# Altium PCB my_ws2812.PcbDoc
Units mil, origin at the board's own origin, x right, y up, seen from the top; angles counter-clockwise.
Board outline 2015 x 1968.5 mil, 2 copper layers (Top Layer, Bottom Layer); 35 components, 33 nets, 131 pads, 41 vias.
Unrouted connection lines stored in the file: 28.
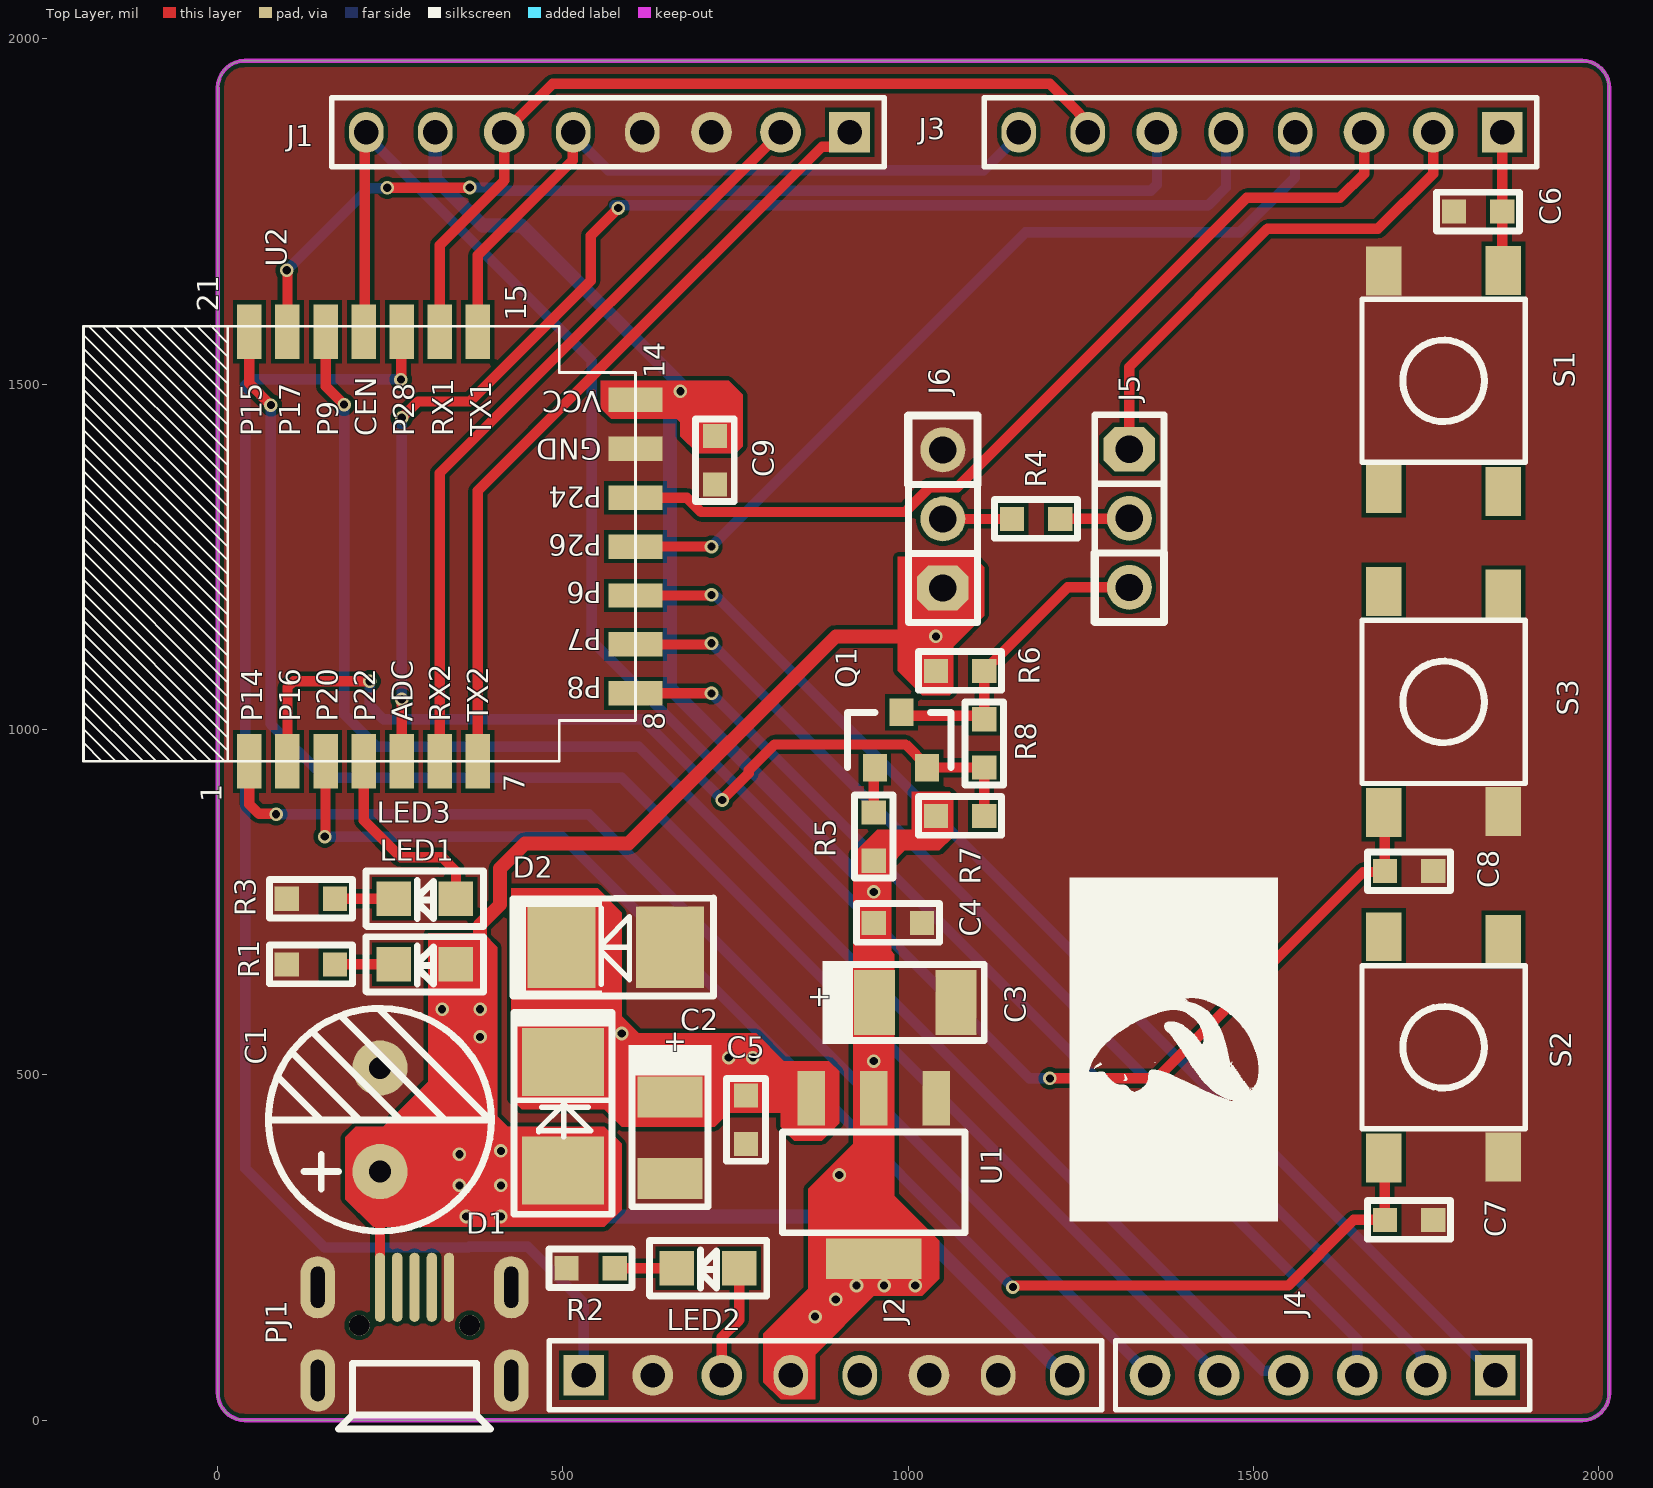
[diagram p0: Top Layer view]
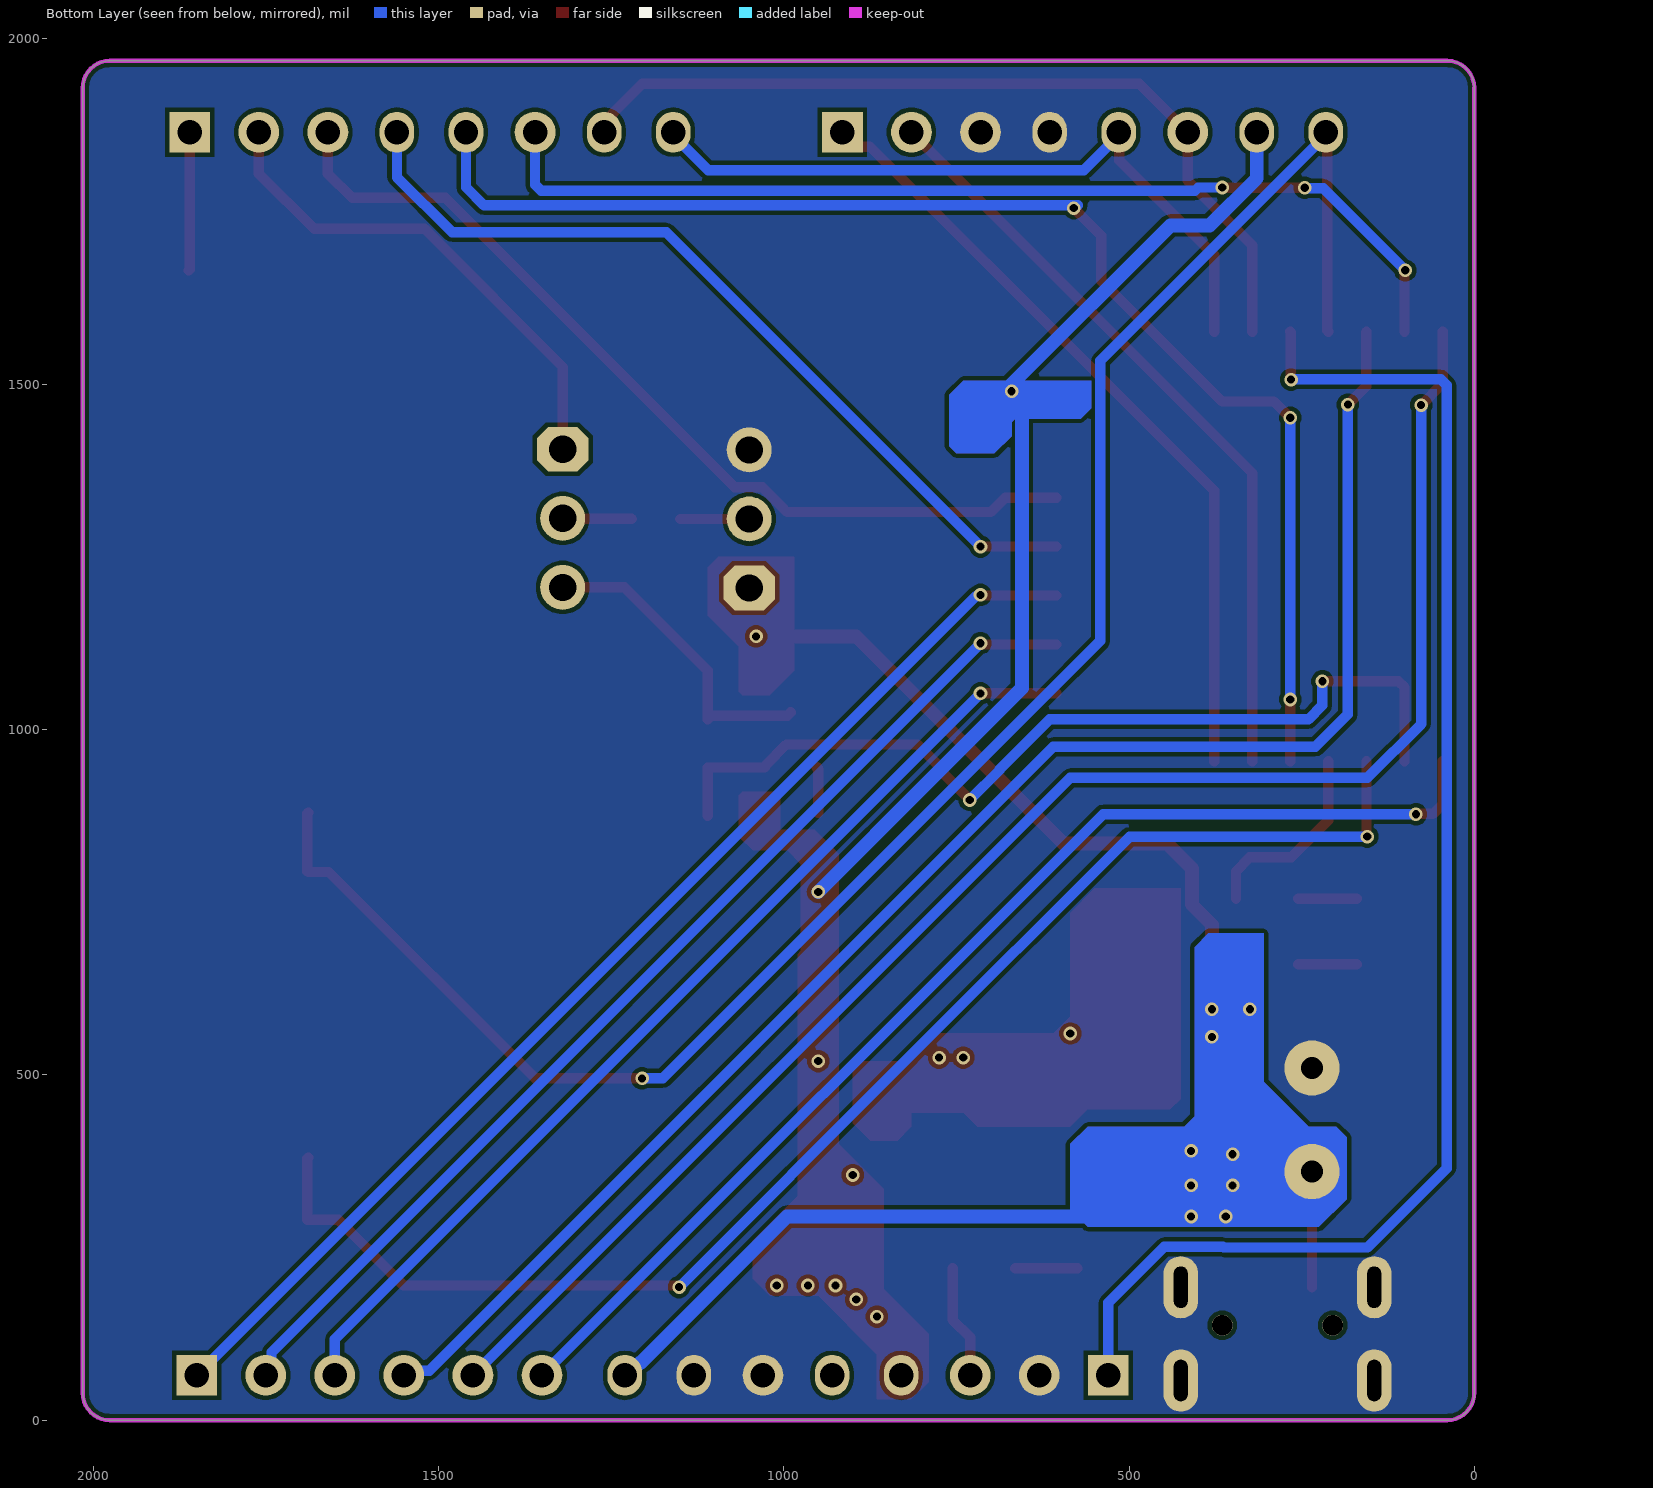
[diagram p1: Bottom Layer view, seen from below]

## Layer stack, top to bottom
Top Solder: solder mask 0.4, Solder Resist, Dk 3.5
Top Layer: signal copper 1.4
Dielectric 1: dielectric 12.6, FR-4, Dk 4.8
Bottom Layer: signal copper 1.4
Bottom Solder: solder mask 0.4, Solder Resist, Dk 3.5

## Board outline
0.01,40.39 0,1929.15 cw(c39.37,1929.13) 39.37,1968.5 1975.61,1968.5 cw(c1975.63,1929.13) 2015,1929.13 2015,39.37 cw(c1975.63,39.37) 1975.63,0 39.37,0 cw(c39.37,39.37)

## Design rules (kind name [scope] priority, off if disabled: settings)
Clearance [All] p1: gap=6 ignorepadtopadclearanceinfootprint=FALSE
HoleToHoleClearance [All] p1: gap=6 allowstackedmicrovias=TRUE
MinimumSolderMaskSliver [All] p1: minsoldermaskwidth=0
PlaneClearance [All] p1: clearance=6
PlaneConnect [All] p1: planeconnectstyle=Direct reliefexpansion=20 reliefentries=4 reliefconductorwidth=10 reliefairgap=10
PolygonConnect [All] p1: connectstyle=Direct reliefconductorwidth=10 reliefentries=4 polygonreliefangle="90 Angle" airgapwidth=10
RoutingVias [All] p1: holewidth=28 width=50 viastyle="Through Hole" minholewidth=28 minwidth=50 maxholewidth=28 maxwidth=50
SilkToSilkClearance [All] p1: silktosilkclearance=0
SilkToSolderMaskClearance [IsPad] p1: minsilkscreentomaskgap=0 clearancetoexposedcopper=TRUE
SolderMaskExpansion [All] p1: expansion=4 istentingtop=FALSE
Width [All] p1: maxlimit=20 minlimit=4 preferedwidth=6
24 further rules are at their usual default settings.

## Components (designator, comment, footprint, x,y, rotation, side; value= is the part's Value field where it differs from the comment)
C1 "220uF±20%/16V" CD0.15 235,435 r90 top
C2 "22uF±20%/16V" 钽电容B3528 655,409.06 r270 top
C3 "22uF±20%/16V" 钽电容B3528 1010,605 r0 top
C4 "0.1uF±20%/50V" C0603 950,720 r0 top
C5 "0.1uF±20%/50V" C0603 765,470 r270 top
C6 "0.1uF±20%/16V" C0603 1790,1750 r0 top
C7 "0.1uF±20%/16V" C0603 1760,290 r180 top
C8 "0.1uF±20%/16V" C0603 1690,795 r0 top
C9 "0.1uF±20%/16V" C0603 720,1355 r90 top
D1 "SS210" SMA(DO-214AC) 500,440 r90 top
D2 "SMBJ05CA" SMB(DO-214AA) 576.26,685 r180 top
J1 "CON8" HDR1X8Z 915,1865 r180 top
J2 "CON8" HDR1X8Z 530,65 r0 top
J3 "CON8" HDR1X8Z 1860,1865 r180 top
J4 "CON6" HDR1X6Z 1850,65 r180 top
J5 "KF301-3P" "SIP3 - 2.54" 1320,1405.91 r270 top
J6 "KF301-3P" "SIP3 - 2.54" 1050,1205 r90 top
LED1 "LED" LED0805_1 345,660 r180 top
LED2 "LED" LED0805_1 755,220 r180 top
LED3 "LED" LED0805_1 345,755 r180 top
PJ1 "MCR_USB" MICRO_USB-NEW-16.12.12 285,125 r180 top
Q1 "S8050" SOT-23-NPN 952,945 r0 top
R1 "1R±5%" R0603 170,660 r180 top
R2 "1K±5%" R0603 505,220 r0 top
R3 "1K±5%" R0603 170,755 r180 top
R4 "1R±5%" R0603 1220,1305 r180 top
R5 "2K±5%" R0603 950,810 r90 top
R6 "2K±5%" R0603 1040,1085 r0 top
R7 "2K±5%" R0603 1040,875 r0 top
R8 "NC/0R" R0603 1110,945 r90 top
S1 "KEY_SW2" KEY4-SMD 1775,1505 r270 top
S2 "KEY_SW2" KEY4-SMD 1775,540 r90 top
S3 "KEY_SW2" KEY4-SMD 1775,1040 r90 top
U1 "GM1117-3.3ST3T" SOT-223 950,350 r180 top
U2 "WIFI_BLE_CBU" WIFI_BLE_CBU 605,1265 r90 top

## Footprints (in the part's own frame and the unit in brackets; to place one, negate y for a bottom-side part, rotate by r counter-clockwise, add the part's x,y. Pads: shape width x height; smd on the part's side, far side on the other; paste and mask are expansions set on the pad)
C0603 [mil]
  rect 35x35 smd: 1(0,0) 2(70,0)
  silkscreen extent -25,-28 95,28, body extent 4,-16 66,15, height 12
CD0.15 [mil]
  round 80 hole 32: 1(-75,0) 2(75,0)
  silkscreen extent -161,-161 161,161, body extent -156,-150 158,165, height 630
HDR1X6Z [mm]
  rect 1.5x1.5 hole 0.9: 1(0,0)
  round 1.5 hole 0.9: 2(2.54,0) 3(5.08,0) 4(7.62,0) 5(10.16,0) 6(12.7,0)
  silkscreen extent -1.27,-1.27 13.97,1.27, body extent -1.27,-1.25 13.97,1.25, height 8.65
HDR1X8Z [mm]
  rect 1.5x1.5 hole 0.9: 1(0,0)
  round 1.5 hole 0.9: 2(2.54,0) 3(5.08,0) 6(12.7,0)
  oval 1.27x1.5 hole 0.9: 4(7.62,0) 5(10.16,0) 7(15.24,0) 8(17.78,0)
  silkscreen extent -1.27,-1.27 19.05,1.27, body extent -1.27,-1.25 19.05,1.25, height 8.65
KEY4-SMD [mm]
  rect 1.8x1.3 smd: 1(-4.035,-2.2) 2(-4.065,2.2) 3(4.065,2.2) 4(3.965,-2.2)
  silkscreen extent -3,-3 3,3
LED0805_1 [mil]
  rect 50x50 smd: 1(0,0) 2(90,0)
  silkscreen extent -40,-40 130,40, body extent 6,-25 84,24, height 30
MICRO_USB-NEW-16.12.12 [mil]
  oval 15x100 smd: 1(-50,-67.5) 2(-25,-67.5) 3(0,-67.5) 4(25,-67.5) 5(50,-67.5)
  oval 50x90 hole 20 slot 60 at 90 deg: 6(-140,-67.5) 7(-140,67.5) 8(140,67.5) 9(140,-67.5)
  round 30 hole 30 unplated: ""(-80,-12.5) ""(80,-12.5)
  silkscreen extent -110,42 110,138, body extent -145,-79 146,158, height 93
R0603 [mil]
  rect 35x35 smd: 1(0,0) 2(70,0)
  silkscreen extent -25,-28 95,28, body extent 2,-16 65,16, height 18
"SIP3 - 2.54" [mil]
  oct 65x75 hole 39.37: 1(0,0)
  round 65 hole 39.37: 2(100,0) 3(200,0)
  silkscreen extent -50,-50 250,50
SMA(DO-214AC) [mm]
  rect 2.5x3 smd: 1(-2,0) 2(2,0)
  silkscreen extent -3.6,-1.84 3.94,1.83, body extent -2.21,-1.38 2.46,1.27, height 2.35
SMB(DO-214AA) [mm]
  rect 2.5x3 smd: 1(-2,0) 2(2,0)
  silkscreen extent -3.6,-1.8 3.91,1.82, body extent -2.28,-1.33 2.39,1.32, height 2.35
SOT-23-NPN [mil]
  rect 35x40 smd: 1(75,0) 2(0,0) 3(38,80)
  silkscreen extent -40,0 110,80, body extent -17,-17 97,80, height 39
SOT-223 [mm]
  rect 1x2 smd: 1(-2.3,-2.95) 2(0,-2.95) 3(2.3,-2.95)
  rect 3.5x1.5 smd: 2(0,2.95)
  silkscreen extent -3.35,-1.71 3.35,1.99, body extent -3.29,-3.55 3.21,3.41, height 1.65
WIFI_BLE_CBU [mm]
  rect 2x0.9 smd: 1(-7.9,14.2) 2(-7.9,12.8) 3(-7.9,11.4) 4(-7.9,10) 5(-7.9,8.6) 6(-7.9,7.2) 7(-7.9,5.8) 15(7.9,5.8) 16(7.9,7.2) 17(7.9,8.6) 18(7.9,10) 19(7.9,11.4) 20(7.9,12.8) 21(7.9,14.2)
  rect 0.9x2 smd: 8(-5.4,0) 9(-3.6,0) 10(-1.8,0) 11(0,0) 12(1.8,0) 13(3.6,0) 14(5.4,0)
  silkscreen extent -7.9,0 8.14,20.33
钽电容B3528 [mm]
  rect 1.5x2.4 smd: 1(-1.5,0) 2(1.5,0)
  silkscreen extent -3.4,-1.53 2.54,1.52

## Part data
C1 C2 C3: library part "CAPACITOR POL", "Capacitor"
C4 C5 C6 C7 C8 C9: library part CAP, "Capacitor"
D1: library part Diode1, "Diode"
D2: library part "D Schottky", "Schottky Diode", MFR=Toshiba
J1 J2 J3 J4: "Connector"
J5 J6: library part CON3, "Connector"
Q1: library part NPN, "NPN Transistor"
R1 R2 R3 R4 R5 R6 R7 R8: library part RES5
U1: library part GM1117
U2: "Module"

## Via types
v1: diameter 19.68, hole 11.81, Top Layer to Bottom Layer, tented both sides, 37 vias
v2: diameter 19.68, hole 11.81, Top Layer to Bottom Layer, 4 vias

## Nets (pads, with @x,y where several pads share a name; then routed paths per layer and width w, separated by ;. In a path a pad name is that pad's centre, name@x,y a point inside that pad or via, vN(x,y) a via of type N, cw(c..) or ccw(c..) an arc to the next point about the centre after c; other vN are vias at no path point)
+3.3V: C3.1 C4.1 C9.2 J1.7 J2.4 R5.1 R7.1 U1.2 U2.14 | length 1408.7
  Bottom Layer w20: J1.7 315,1798.23 383.23,1730 440,1730 670,1500 v1(670,1490) 655,1475 655,1060 785.84,929.16 v1(950,765)
  other v1: 865,150 895,175 925,195 965,195 1010,195 950,520
  other v2: 900,355
+5V: C1.1 D1.1 J2.8 J6.1 LED1.1 PJ1.5 R6.1 | length 2069
  Top Layer w15: PJ1.5 C1.1
  Top Layer w20: v1(380,595) 380,717.37 409,746.37 409,799 445,835 595,835 895,1135 v1(1040,1135)
  Bottom Layer w20: v1(410,295) 995,295 1206.35,83.65 1207.76,83.65 1226.41,65 J2.8
  other v1: 360,295 350,340 410,340 350,385 410,390 380,555 325,595
ADC: J3.5 U2.5 | length 1953.6
  Top Layer w15: v1@265,1045 v1(266.42,1043.58) U2.5 ; v1(266.42,1451.42) 290,1475 365,1475 540,1650 540,1715 v1(580,1755)
  Bottom Layer w15: v1(266.42,1043.58) v1(266.42,1451.42) ; v1@574,1759 1434,1759 1460,1785 J3.5
GND: C1.2 C2.2 C3.2 C4.2 C5.2 C6.1 C7.1 C8.2 C9.1 D2.1 J1.3 J1.4 J2.2 J2.6 J2.7 J6.3 PJ1.1 PJ1.6 PJ1.7 PJ1.8 PJ1.9 R1.2 R2.1 R3.2 S1.1 S2.1 S3.1 U1.1 U2.13
NetC2_1: C2.1 C5.1 D1.2 D2.2 U1.3
  other v2: 740,525 775,525 585,560
NetC6_2: C6.2 J3.1 S1.2 | length 200.6
  Top Layer w15: J3.1 C6.2 1860,1666.65 S1.2
NetJ2_3: J2.3 LED2.1 | length 165.4
  Top Layer w15: J2.3 730,120 755,145 LED2.1
NetJ6_2: J6.2 R4.2 | length 100
  Top Layer w15: J6.2 R4.2
NetLED1_2: LED1.2 R1.1 | length 85
  Top Layer w15: R1.1 LED1.2
NetLED2_2: LED2.2 R2.2 | length 90
  Top Layer w15: R2.2 LED2.2
NetLED3_2: LED3.2 R3.1 | length 85
  Top Layer w15: R3.1 LED3.2
NetQ1_2: 
OUT_DATA: Q1.1 R7.2 R8.1 U2.2 | length 1333.6
  Top Layer w15: U2.2 101.06,1061.21 109.85,1070 v1(220,1070) ; v1(730.64,898.09) 768.98,936.44 768.98,941.05 806.43,978.5 996,978.5 1027,947.5 Q1.1 R8.1 R7.2
  Bottom Layer w15: v1(220,1070) 220,1035 240,1015 615,1015 687.26,942.74 687.26,941.47 v1(730.64,898.09)
OUT_RGB: J5.2 R4.1 | length 100.4
  Top Layer w15: R4.1 1220.45,1305.45 1319.55,1305.45 J5.2
OUT_RGB_ARD: J3.2 J5.1 | length 735.1
  Top Layer w15: J5.1 1320,1525 1520,1725 1680,1725 1760,1805 J3.2
OUT_RGB_CBU: J5.3 Q1.3 R6.2 R8.2 | length 454.2
  Top Layer w15: Q1.3 995,1020 1105,1020 R8.2 R6.2 1230.91,1205.91 J5.3
P6: J4.1 U2.10 | length 1713.4
  Top Layer w15: U2.10 714.13,1194.13 v1(715,1195)
  Bottom Layer w15: v1(715,1195) 715.9,1194.1 720.9,1194.1 J4.1
P6_KEY1: C7.2 S2.2 U2.3 | length 2045.5
  Top Layer w15: v1(155,845) 156.18,846.18 U2.3 ; v1(1151.42,192.76) 1152.32,193.66 1155.63,193.66 1156.97,195 1550,195 1645,290 C7.2 1690,378.35 S2.2
  Bottom Layer w15: v1(155,845) 499.18,845 827.57,516.62 v1(1151.42,192.76)
P7: J4.2 U2.9 | length 1598.7
  Top Layer w15: U2.9 v1@715,1123.27
  Bottom Layer w15: v1(715,1125) 1741.57,98.43 1741.57,73.43 J4.2
P8: J4.3 U2.8 | length 1485.8
  Top Layer w15: U2.8 712.4,1052.4 v1@715,1055
  Bottom Layer w15: v1(715,1052.4) 1650,117.4 J4.3
P9: J4.4 U2.19 | length 2328.5
  Top Layer w15: U2.19 156.42,1575.78 156.42,1497.24 v1(183.08,1470.59)
  Bottom Layer w15: v1(183.08,1470.59) 183.08,1021.92 230,975 610,975 1513.21,71.79 1543.21,71.79 J4.4
P14: J4.6 U2.1 | length 1708.5
  Top Layer w15: U2.1 45.94,892.11 59.75,878.3 83.73,878.3 v1(84.63,877.4)
  Bottom Layer w15: v1(84.63,877.4) 537.6,877.4 J4.6
P15: J4.5 U2.21 | length 2344.8
  Top Layer w15: U2.21 45.52,1575.6 45.52,1501.32 v1(76.99,1469.84)
  Bottom Layer w15: v1(76.99,1469.84) 76.99,1008.01 155,930 585,930 J4.5
P17: J3.6 U2.20 | length 1481
  Top Layer w15: v1(100,1665) 101.06,1663.94 U2.20 ; v1(245.56,1784.53) 245.74,1784.71 364.71,1784.71 v1(364.89,1784.89)
  Bottom Layer w15: v1(100,1665) 218.64,1783.64 244.66,1783.64 v1(245.56,1784.53) ; v1(364.89,1784.89) 399.84,1784.89 404.73,1780 1351.21,1780 1360,1788.79 J3.6
P22: LED3.1 U2.4 | length 289.5
  Top Layer w15: U2.4 211.3,868.7 265,815 325,815 345,795 LED3.1
P24: J3.3 U2.12 | length 1326.8
  Top Layer w15: U2.12 679.13,1335.87 700,1315 995.21,1315 1004,1323.79 1004,1324.05 1030.95,1351 1071,1351 1490,1770 1625,1770 1660,1805 J3.3
P26: J3.4 U2.11 | length 1241.6
  Top Layer w15: U2.11 v1(715,1265)
  Bottom Layer w15: v1(715,1265) 1170,1720 1480,1720 1560,1800 J3.4
P28: J2.1 U2.17 | length 2108.8
  Top Layer w15: v1(265.21,1506.82) 265.81,1507.42 265.81,1575.42 U2.17
  Bottom Layer w15: v1(265.21,1506.82) 264.8,1507.23 48.79,1507.23 40,1498.44 40,365 155,250 363,250 364,251 449,251 530,170 J2.1
RST: C8.1 J1.8 S3.2 U2.18 | length 2783
  Top Layer w15: U2.18 213.15,1577.87 213.15,1863.15 J1.8 ; v1(1205,495) 1360,495 1658.79,793.79 1688.79,793.79 C8.1 1690,878.35 S3.2
  Bottom Layer w15: J1.8 215,1860.47 541.5,1533.97 541.5,1128.5 761.68,908.32 1175,495 v1(1205,495)
RX2: J1.2 U2.6 | length 1115.4
  Top Layer w15: U2.6 321.54,1371.54 J1.2
TX2: J1.1 U2.7 | length 1145.2
  Top Layer w15: U2.7 376.65,1345.75 541.5,1510.59 875.02,1844.11 894.11,1844.11 J1.1
WRX: J1.6 J3.7 U2.16 | length 1239.5
  Top Layer w15: U2.16 321.54,1701.54 415,1795 J1.6 485,1935 1205,1935 1246.65,1893.35 1246.65,1892.35 1260,1879 J3.7
WTX: J1.5 J3.8 U2.15 | length 1042.1
  Top Layer w15: U2.15 376.65,1686.65 465,1775 514.15,1824.15 514.15,1864.15 J1.5
  Bottom Layer w15: J1.5 515,1860.47 565.47,1810 1109.53,1810 1160,1860.47 J3.8
pads on no net: J2.5 PJ1. PJ1.2 PJ1.3 PJ1.4 Q1.2 R5.2 S1.3 S1.4 S2.3 S2.4 S3.3 S3.4
copper on no net: | length 65.8
  Top Layer w15.75: 950,880 950,943 952,945

## Polygon pours and split planes (outlines as drawn)
GND on Top Layer "GND_L01_P000" (solid, pour order 0): 0,1930 0,1945 10,1955 25,1970 40,1970 1990,1970 2015,1945 2015,20 1995,0 20,0 0,20
GND on Bottom Layer "GND_L02_P001" (solid, pour order 1): 0,1930 0,1945 10,1955 25,1970 40,1970 1990,1970 2015,1945 2015,20 1995,0 20,0 0,20

## Keep-outs
Keep-Out Layer:
  the board outline again, w5.98

## Other copper
Top Layer:
  region net +5V: 985,1250 1095,1250 1110,1235 1110,1165 1065,1120 1065,1055 1060,1050 1020,1050 985,1085 985,1185
  region net +5V: 305,705 385,705 405,685 405,440 420,425 560,425 585,400 585,305 560,280 225,280 185,320 185,410 200,425 240,425 305,490
  region net NetC2_1: 425,770 550,770 585,735 585,585 610,560 780,560 820,520 885,520 900,505 900,430 875,405 835,405 815,425 815,445 755,445 740,445 720,425 585,425 560,450 440,450 425,465
  region net +3.3V: 555,1505 740,1505 760,1485 760,1410 750,1400 695,1400 670,1425 670,1445 665,1450 655,1450 570,1450 555,1465
  region net +3.3V: 1005,910 1060,910 1065,905 1065,845 1045,825 995,825 975,805 975,680 980,675 980,325 1045,260 1045,205 1020,180 950,180 865,95 865,30 815,30 790,55 790,125 855,190 855,335 920,400 920,820 955,855 1005,855
Bottom Layer:
  region net +3.3V: 555,1505 740,1505 760,1485 760,1410 750,1400 695,1400 670,1425 670,1445 665,1450 655,1450 570,1450 555,1465
  region net +5V: 305,705 385,705 405,685 405,440 420,425 560,425 585,400 585,305 560,280 225,280 185,320 185,410 200,425 240,425 305,490

## Silkscreen, mask and mechanical layers (free items; w line width, h text height)
Top Overlay:
  drawing of 939 lines, arcs and shapes, not listed

## Text inside footprints (layer, text, board x,y; h text height)
C2: Top Overlay "+" at 645,534.06 h30
C3: Top Overlay "+" at 885,595 h30 r90
U2: Top Overlay "15" at 447,1592 h30 r90; Top Overlay "14" at 647,1509 h30 r90; Top Overlay "8" at 647,999 h30 r90; Top Overlay "7" at 444.79,908.92 h30 r90; Top Overlay "P8" at 556,1076 h30 r180; Top Overlay "P7" at 556,1145 h30 r180; Top Overlay "P6" at 556,1213.54 h30 r180; Top Overlay "P26" at 556,1282.37 h30 r180; Top Overlay "P24" at 556,1351.37 h30 r180; Top Overlay "1" at 5.79,894.92 h30 r90; Top Overlay "21" at 1,1605 h30 r90; Top Overlay "P14" at 64.84,1011 h30 r90; Top Overlay "P16" at 119.9,1011 h30 r90; Top Overlay "P20" at 173.68,1011 h30 r90; Top Overlay "P22" at 228.1,1011 h30 r90; Top Overlay "ADC" at 282.53,1011 h30 r90; Top Overlay "RX2" at 336.95,1011 h30 r90; Top Overlay "TX2" at 392,1011 h30 r90; Top Overlay "VCC" at 555.94,1490 h30 r180; Top Overlay "GND" at 556,1421 h30 r180; Top Overlay "TX1" at 396,1425.07 h30 r90; Top Overlay "RX1" at 340.77,1425.07 h30 r90; Top Overlay "P28" at 284.91,1425.07 h30 r90; Top Overlay "CEN" at 229.68,1425.07 h30 r90; Top Overlay "P9" at 174.46,1425.07 h30 r90; Top Overlay "P17" at 119.86,1425.07 h30 r90; Top Overlay "P15" at 64,1425.07 h30 r90